# EAGLE board Fall Analyzer Shield (EAGLE 8.6.0)
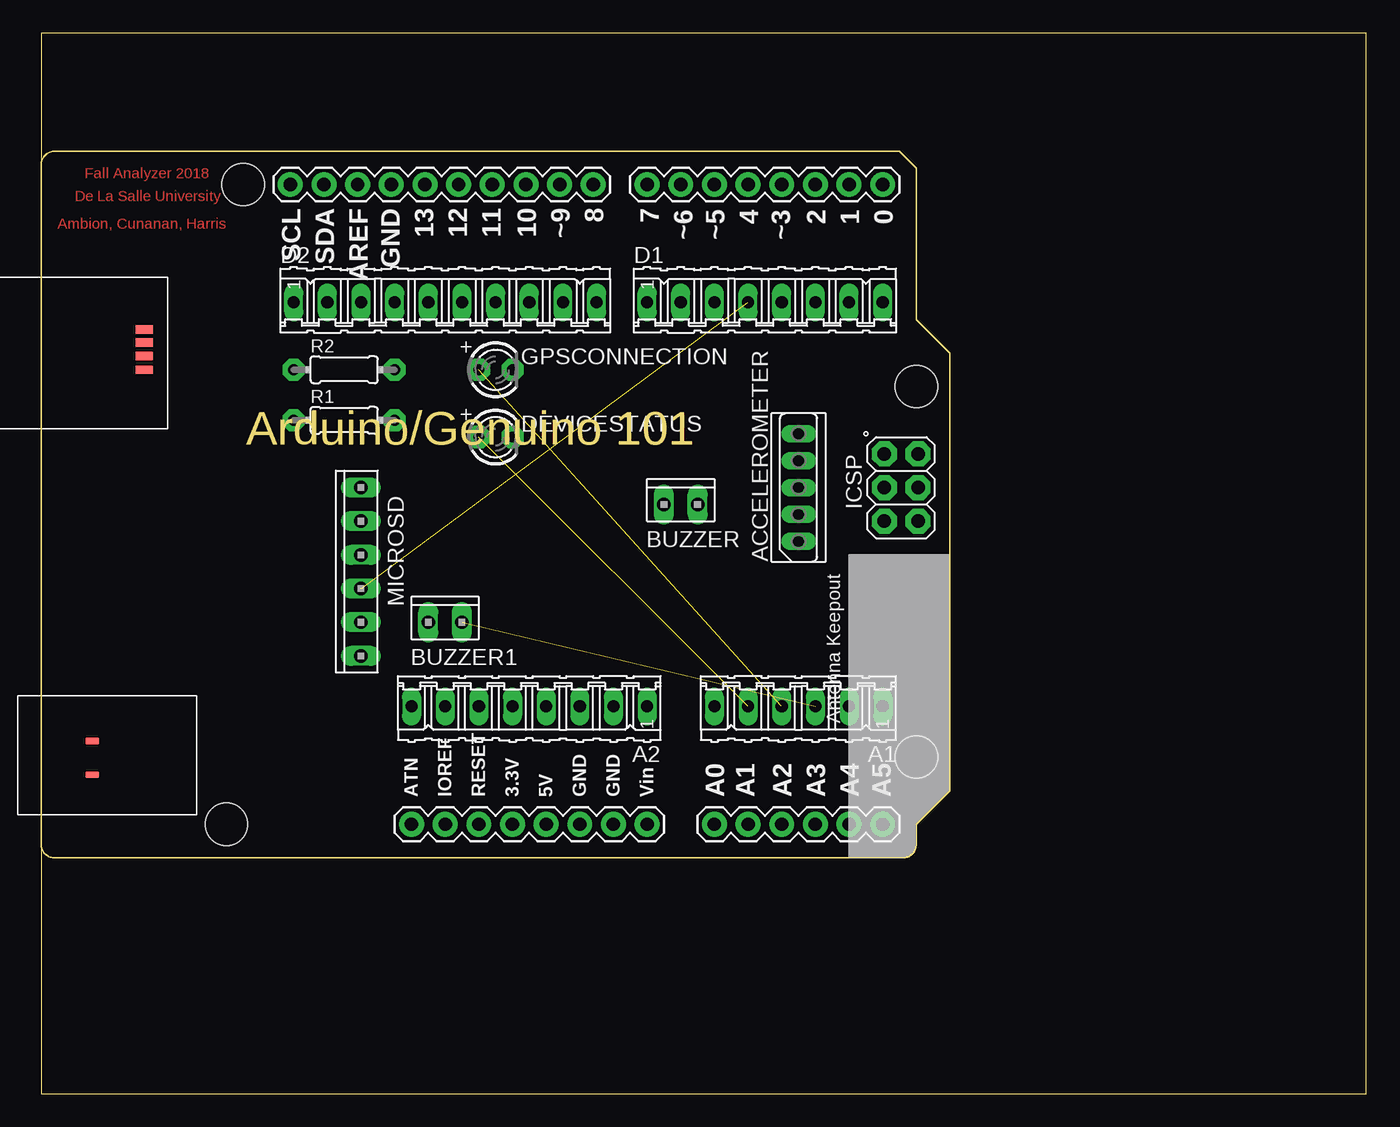
[diagram p0: board, top side]
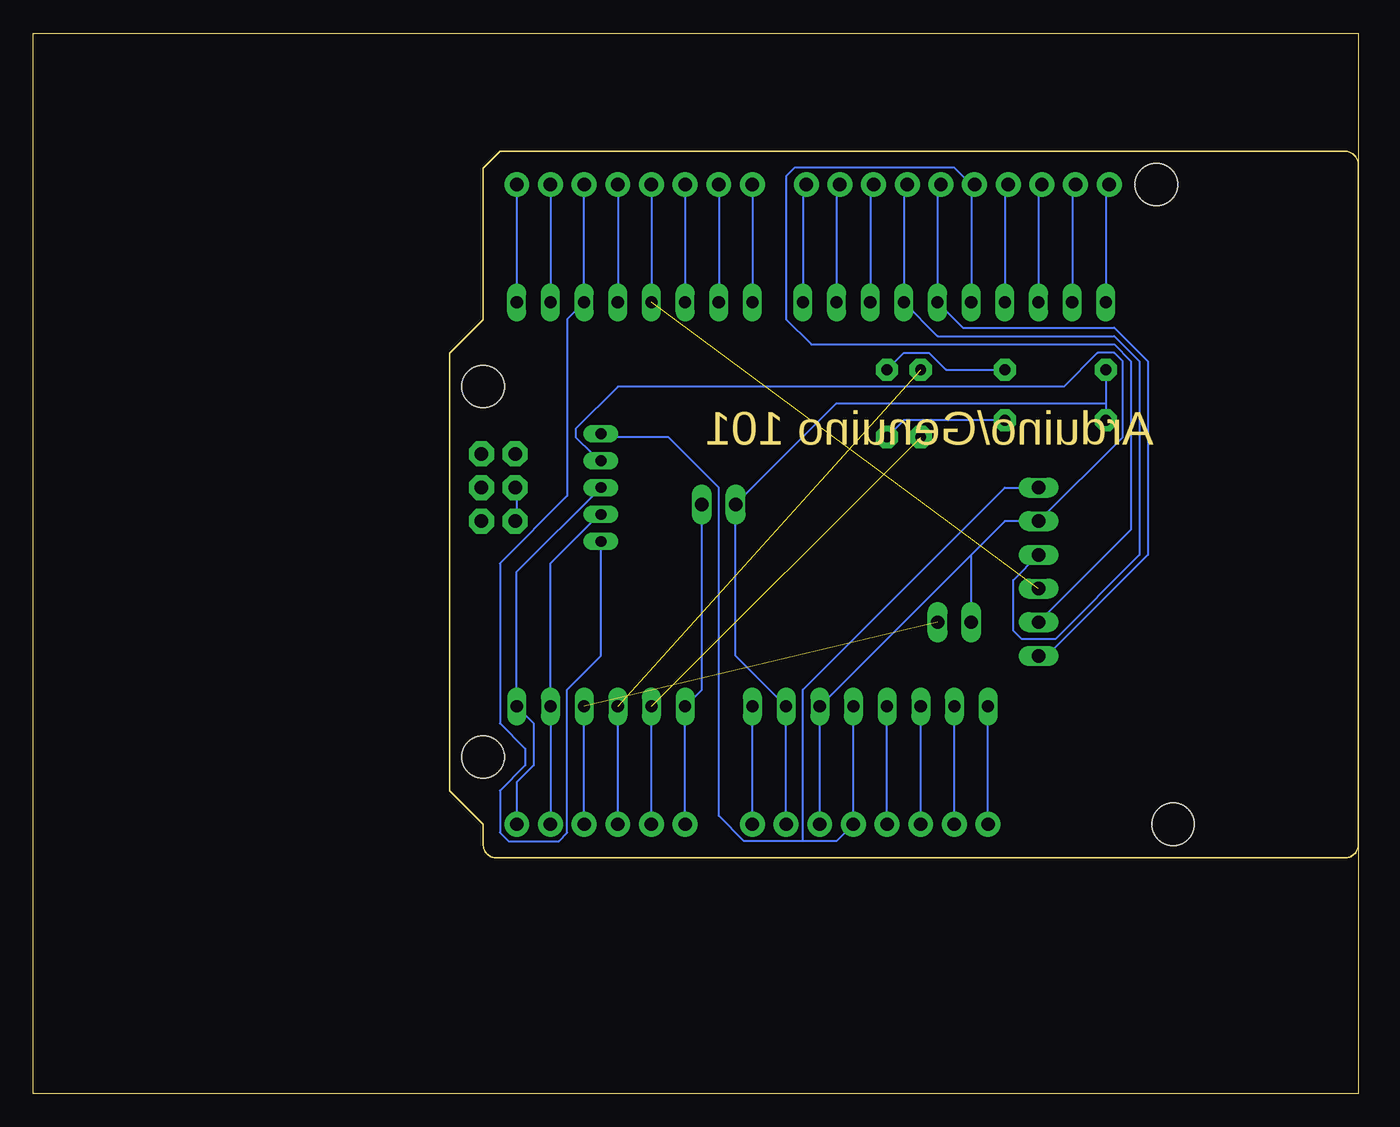
[diagram p1: board, bottom side, seen from below]

Size 100 x 80 mm. Coordinates in mm from the lower left corner, seen from the top.
Outline: 0,0 100,0 100,80 0,80 0,0
Copper layers (1*16): Top 0.035mm / dielectric 1.5mm / Bottom 0.035mm
Design rules "default": minimum track width 6mil, minimum drill 0.35mm, track to track 6mil, track to pad 6mil, pad to pad 6mil, via to via 6mil, smd to smd 6mil, copper to edge 40mil, drill to drill 6mil, minimum pad ring 10mil, minimum via ring 8mil, stop-mask expansion 4mil, vias tented up to drill 0mil, thermal gap 10mil

## Footprints (pad centres in the part's own frame; a part is rotated, then mirrored left to right if it is on the bottom)
06P = drill 0.914 long: 1 -6.35,0; 2 -3.81,0; 3 -1.27,0; 4 1.27,0; 5 3.81,0; 6 6.35,0
08P = drill 0.914 long: 1 -8.89,0; 2 -6.35,0; 3 -3.81,0; 4 -1.27,0; 5 1.27,0; 6 3.81,0; 7 6.35,0; 8 8.89,0
SPB5 = drill 0.813 long: 1 -4.064,0; 2 -2.032,0; 3 0,0; 4 2.032,0; 5 4.064,0
10X02MTA = drill 1.016 long: 1 1.27,0; 2 -1.27,0
10P = drill 0.914 long: 1 -11.43,0; 2 -8.89,0; 3 -6.35,0; 4 -3.81,0; 5 -1.27,0; 6 1.27,0; 7 3.81,0; 8 6.35,0; 9 8.89,0; 10 11.43,0
LED3MM = drill 0.813 pad 1.676 octagon: A -1.27,0; K 1.27,0
10X06MTA = drill 1.016 long: 1 6.35,0; 2 3.81,0; 3 1.27,0; 4 -1.27,0; 5 -3.81,0; 6 -6.35,0
ARDUINO_101 = drill 1.016 pad 1.88: 0 27.94,25.4; 1 25.4,25.4; 2 22.86,25.4; 3 20.32,25.4; 3.3V 0,-22.86; 4 17.78,25.4; 5 15.24,25.4; 5V 2.54,-22.86; 6 12.7,25.4; 7 10.16,25.4; 8 6.096,25.4; 9 3.556,25.4; 10 1.016,25.4; 11 -1.524,25.4; 12 -4.064,25.4; 13 -6.604,25.4; A0 15.24,-22.86; A1 17.78,-22.86; A2 20.32,-22.86; A3 22.86,-22.86; A4 25.4,-22.86; A5 27.94,-22.86; AREF -11.684,25.4; ATN -7.62,-22.86; GND -9.144,25.4; GND. 7.62,-22.86; GND.. 5.08,-22.86; I/OREF -5.08,-22.86; RESET -2.54,-22.86; SCL -16.764,25.4; SDA -14.224,25.4; VIN 10.16,-22.86 | drill 1.016 pad 1.88 octagon: +5V 30.607,5.08; GND_ 30.607,0; MISO 28.067,5.08; MOSI 30.607,2.54; RESET. 28.067,0; SCK 28.067,2.54 | smd 1.016 x 0.508: <PWR>+V -31.699,-16.586; <PWR>-V -31.699,-19.126 | smd 1.27 x 0.635: <USB>+V -27.788,14.478; <USB>D+ -27.788,13.487; <USB>D- -27.788,12.471; <USB>GND -27.788,11.43 | hole 3.2: 30.48,-17.78; 30.48,10.16; -20.32,25.4; -21.59,-22.86
0204/7 = drill 0.813 pad 1.676 octagon: 1 -3.81,0; 2 3.81,0

## Placement (x,y rotation side)
A1  [06P]  57.15,29.21 180 top
A2  [08P]  36.83,29.21 180 top
ACCELEROMETER  SPB5  [SPB5]  57.15,45.72 90 top
BUZZER  [10X02MTA]  48.26,44.45 0 top
BUZZER1  [10X02MTA]  30.48,35.56 0 top
D1  [08P]  54.61,59.69 0 top
D2  [10P]  30.48,59.69 0 top
DEVICESTATUS  [LED3MM]  34.29,49.53 0 top
GPSCONNECTION  [LED3MM]  34.29,54.61 0 top
MICROSD  [10X06MTA]  24.13,39.37 90 top
PCB1  ARDUINO_101  [ARDUINO_101]  35.56,43.18 0 top
R1  300  [0204/7]  22.86,50.8 0 top
R2  300  [0204/7]  22.86,54.61 0 top

## Library data of the parts
A1 A2 D1 D2 = con-amp-quick; OC_FARNELL: unknown; OC_NEWARK: unknown
ACCELEROMETER = con-hirschmann; OC_FARNELL: unknown; OC_NEWARK: unknown
BUZZER BUZZER1 MICROSD = con-amp
DEVICESTATUS GPSCONNECTION R1 R2 = adafruit
PCB1 = E14_Arduino_revC

## Nets
N$1: A2.3 ACCELEROMETER.4 BUZZER1.2 MICROSD.2 PCB1.GND..
N$2: DEVICESTATUS.K R1.2
N$3: GPSCONNECTION.K R2.2
N$4: A1.6 BUZZER.1 PCB1.A0
N$5: A1.5 DEVICESTATUS.A PCB1.A1
N$6: A1.4 GPSCONNECTION.A PCB1.A2
N$7: A1.3 BUZZER1.1 PCB1.A3
N$8: PCB1.RESET. PCB1.SCK
N$9: A2.4 ACCELEROMETER.5 MICROSD.1 PCB1.5V
N$10: A2.2 BUZZER.2 PCB1.GND. R1.1 R2.1
N$11: A1.1 ACCELEROMETER.3 PCB1.A5
N$12: A1.2 ACCELEROMETER.2 PCB1.A4
N$13: D2.7 MICROSD.3 PCB1.11
N$14: A2.8 PCB1.ATN
N$15: A2.7 PCB1.I/OREF
N$16: A2.6 PCB1.RESET
N$17: A2.5 PCB1.3.3V
N$19: D1.4 MICROSD.4 PCB1.4
N$20: D2.5 MICROSD.5 PCB1.13
N$21: D2.6 MICROSD.6 PCB1.12
N$25: A2.1 PCB1.VIN
N$32: D2.1 PCB1.SCL
N$33: D2.2 PCB1.SDA
N$34: D2.3 PCB1.AREF
N$35: D2.4 PCB1.GND
N$39: D2.8 PCB1.10
N$40: D2.9 PCB1.9
N$41: D2.10 PCB1.8
N$42: D1.1 PCB1.7
N$43: D1.2 PCB1.6
N$44: D1.3 PCB1.5
N$46: D1.5 PCB1.3
N$47: ACCELEROMETER.1 D1.6 PCB1.2
N$48: D1.7 PCB1.1
N$49: D1.8 PCB1.0

## Tracks (layer width: path | path; a pad name or v marks a point on that pad's centre or on a via)
N$1
  Bottom 0.152: PCB1.GND.. A2.3 29.21,40.64 | ACCELEROMETER.4 57.15,48.26 57.78,48.26 59.05,49.53 59.05,50.16 55.88,53.34 22.23,53.34 19.68,55.88 18.41,55.88 17.78,55.24 17.78,49.53 MICROSD.2 26.67,43.18 29.21,40.64 | BUZZER1.2 29.21,40.64
N$2
  Bottom 0.152: DEVICESTATUS.K 34.29,50.8 R1.2
N$3
  Bottom 0.152: R2.2 31.11,54.61 32.38,55.88 34.29,55.88 GPSCONNECTION.K
N$4
  Bottom 0.152: PCB1.A0 A1.6 49.53,30.48 BUZZER.1
N$5  (1 unrouted)
  Bottom 0.152: PCB1.A1 A1.5
N$6  (1 unrouted)
  Bottom 0.152: PCB1.A2 A1.4
N$7  (1 unrouted)
  Bottom 0.152: PCB1.A3 A1.3
N$8
  Bottom 0.152: PCB1.RESET. 63.5,43.18 63.5,45.72 PCB1.SCK
N$9
  Bottom 0.152: 41.91,19.05 39.37,19.05 PCB1.5V A2.4 | 41.91,19.05 46.35,19.05 48.26,20.95 48.26,45.72 52.07,49.53 57.15,49.53 ACCELEROMETER.5 | MICROSD.1 26.67,45.72 41.91,30.48 41.91,19.05
N$10
  Bottom 0.152: R2.1 19.05,52.07 | 19.05,52.07 R1.1 | PCB1.GND. A2.2 46.99,33.02 BUZZER.2 39.37,52.07 19.05,52.07
N$11
  Bottom 0.152: ACCELEROMETER.3 63.5,39.37 A1.1 62.23,27.94 62.23,24.77 63.5,23.5 PCB1.A5
N$12
  Bottom 0.152: ACCELEROMETER.2 57.15,43.18 57.78,43.18 60.96,40.01 A1.2 PCB1.A4
N$13
  Bottom 0.152: PCB1.11 34.29,68.58 D2.7 31.75,57.15 18.41,57.15 16.51,55.24 16.51,40.64 22.86,34.29 25.4,34.29 26.04,34.92 26.04,38.73 MICROSD.3
N$14
  Bottom 0.152: PCB1.ATN A2.8
N$15
  Bottom 0.152: PCB1.I/OREF A2.7
N$16
  Bottom 0.152: PCB1.RESET A2.6
N$17
  Bottom 0.152: PCB1.3.3V A2.5
N$19  (1 unrouted)
  Bottom 0.152: PCB1.4 D1.4
N$20
  Bottom 0.152: 29.21,68.58 D2.5 | MICROSD.5 17.14,42.55 17.14,55.24 18.41,56.52 41.27,56.52 43.18,58.42 43.18,69.22 42.55,69.85 30.48,69.85 29.21,68.58 | 29.21,68.58 PCB1.13
N$21
  Bottom 0.152: PCB1.12 31.75,68.58 D2.6 29.84,57.78 18.41,57.78 15.88,55.24 15.88,40.64 23.5,33.02 MICROSD.6
N$25
  Bottom 0.152: PCB1.VIN A2.1
N$32
  Bottom 0.152: D2.1 19.05,68.58 PCB1.SCL
N$33
  Bottom 0.152: D2.2 21.59,68.58 PCB1.SDA
N$34
  Bottom 0.152: D2.3 24.13,68.58 PCB1.AREF
N$35
  Bottom 0.152: D2.4 26.67,68.58 PCB1.GND
N$39
  Bottom 0.152: D2.8 36.83,68.58 PCB1.10
N$40
  Bottom 0.152: D2.9 39.37,68.58 PCB1.9
N$41
  Bottom 0.152: D2.10 41.91,68.58 PCB1.8
N$42
  Bottom 0.152: PCB1.7 D1.1
N$43
  Bottom 0.152: PCB1.6 D1.2
N$44
  Bottom 0.152: PCB1.5 D1.3
N$46
  Bottom 0.152: PCB1.3 D1.5
N$47
  Bottom 0.152: ACCELEROMETER.1 57.15,33.02 59.69,30.48 59.69,19.68 60.33,19.05 64.14,19.05 64.77,19.68 64.77,22.86 62.87,24.77 62.87,26.04 64.77,27.94 64.77,40.01 59.69,45.09 59.69,58.42 D1.6 PCB1.2
N$48
  Bottom 0.152: PCB1.1 D1.7
N$49
  Bottom 0.152: PCB1.0 D1.8

## Text on the board
Top: Fall Analyzer 2018 | De La Salle University | Ambion, Cunanan, Harris